# EAGLE board ADS7947 Breakout Layout V1 (EAGLE 9.6.2)
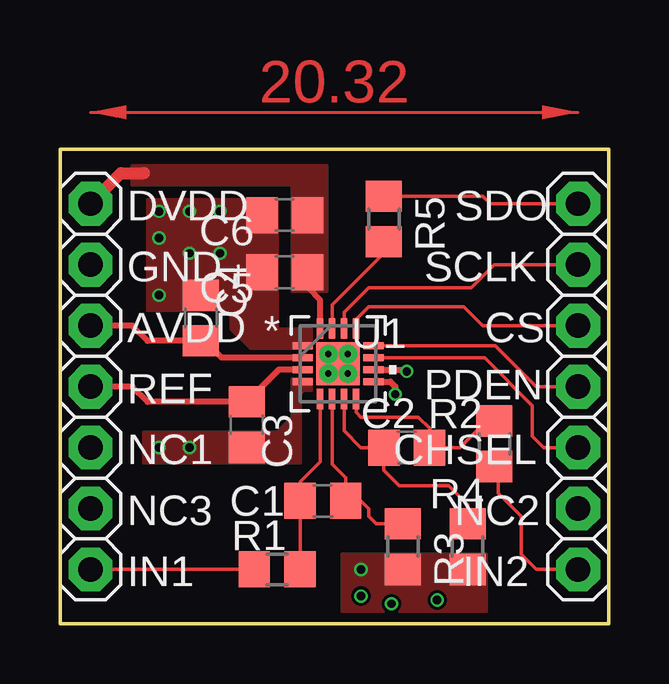
[diagram p0: board, top side]
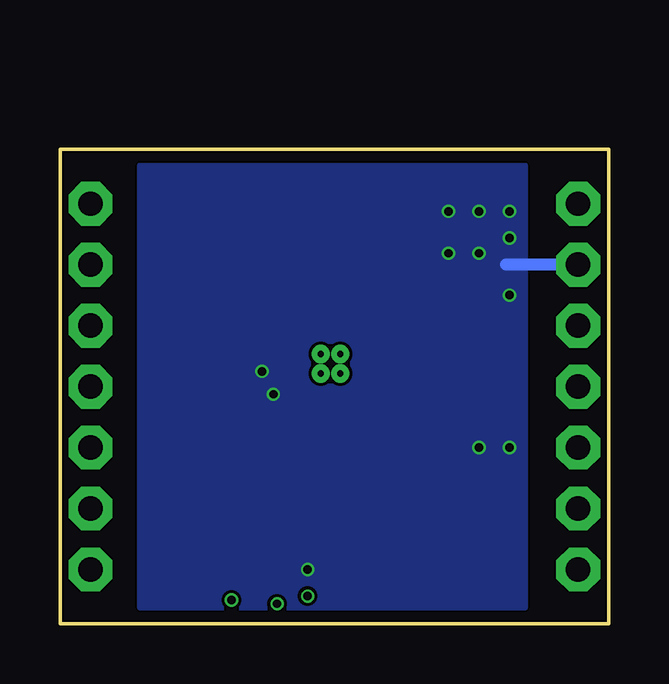
[diagram p1: board, bottom side, seen from below]

Size 22.86 x 19.78 mm. Coordinates in mm from the lower left corner, seen from the top.
Outline: 0,0 22.86,0 22.86,19.78 0,19.78 0,0
Copper layers (1*16): Top 0.035mm / dielectric 1.6mm / Bottom 0.035mm
Design rules "MacrofabStandard": minimum track width 5mil, minimum drill 10mil, track to track 5mil, track to pad 5mil, pad to pad 5mil, via to via 5mil, smd to smd 5mil, copper to edge 10mil, drill to drill 6mil, minimum pad ring 10mil, minimum via ring 4mil, stop-mask expansion 5mil, vias tented up to drill 0mil, thermal gap 10mil

## Footprints (pad centres in the part's own frame; a part is rotated, then mirrored left to right if it is on the bottom)
1X01 = drill 1.016 octagon: 1 0,0
C0805 = smd 1.3 x 1.5: 1 -0.95,0; 2 0.95,0
R0805 = smd 1.3 x 1.5: 1 -0.95,0; 2 0.95,0
RTE16_1P7X1P7 = smd 0.85 x 0.28: 1 -1.475,0.75; 2 -1.475,0.25; 3 -1.475,-0.25; 4 -1.475,-0.75; 9 1.475,-0.75; 10 1.475,-0.25; 11 1.475,0.25; 12 1.475,0.75 | smd 0.28 x 0.85: 5 -0.75,-1.475; 6 -0.25,-1.475; 7 0.25,-1.475; 8 0.75,-1.475; 13 0.75,1.475; 14 0.25,1.475; 15 -0.25,1.475; 16 -0.75,1.475 | smd 1.803 x 1.803: 17 0,0 | drill 0.254 pad 0.508: V -0.406,-0.406; V_1 -0.406,0.406; V_2 0.406,-0.406; V_3 0.406,0.406

## Placement (x,y rotation side)
AVDD  [1X01]  1.27,12.43 0 top
C1  470 pF  [C0805]  10.95,5.13 180 top
C2  470 pF  [C0805]  14.45,7.35 0 top
C3  1 uF  [C0805]  7.78,8.3 270 top
C4  1 uF  [C0805]  5.87,12.75 90 top
C5  0.1 uF  [C0805]  9.37,14.65 180 top
C6  1 uF  [C0805]  9.37,17.03 180 top
CHSEL  [1X01]  21.59,7.35 0 top
CS  [1X01]  21.59,12.43 0 top
DVDD  [1X01]  1.27,17.51 0 top
GND  [1X01]  1.27,14.97 0 top
IN1  [1X01]  1.27,2.27 0 top
IN2  [1X01]  21.59,2.27 0 top
NC1  [1X01]  1.27,7.35 0 top
NC2  [1X01]  21.59,4.81 0 top
NC3  [1X01]  1.27,4.81 0 top
PDEN  [1X01]  21.59,9.89 0 top
R1  5 Ohm  [R0805]  9.05,2.27 0 top
R2  5 Ohm  [R0805]  18.1,7.51 90 top
R3  5 Ohm  [R0805]  14.29,3.22 270 top
R4  5 Ohm  [R0805]  16.99,3.22 270 top
R5  47 Ohm  [R0805]  13.49,16.88 270 top
REF  [1X01]  1.27,9.89 0 top
SCLK  [1X01]  21.59,14.97 0 top
SDO  [1X01]  21.59,17.51 0 top
U1  ADS7947SRTET  [RTE16_1P7X1P7]  11.59,10.84 0 top

## Library data of the parts
AVDD CHSEL CS DVDD GND IN1 IN2 NC1-NC3 PDEN REF SCLK SDO = pinhead
C1-C6 = rcl; SPICEPREFIX: C
R1-R5 = rcl; SPICEPREFIX: R
U1 = ADS7947; DATASHEET_URL: http://www.ti.com/lit/gpn/ADS7947; DESCRIPTION: 12-Bit, 2 MSPS, Dual Channel, Pseudo-differential uPower Serial SAR ADC; FAMILY_NAME: PRECISION ADC (<=10MSPS); GENERIC_PART_NUMBER: ADS7947; INDUSTRY_STD_PKG_TYPE: WQFN; MANUFACTURER: Texas Instruments; PACKAGE_DESIGNATOR: RTE; PIN_COUNT: 16

## Nets
EPAD: U1.17
GND [GND]: C3.2 C4.2 C5.2 C6.2 GND.1 R3.2 R4.2 U1.1 U1.4 U1.9 U1.10
N$1: IN2.1 R2.1
N$2: C2.2 R2.2 U1.8
N$3: C1.2 R1.2 U1.5
N$4: IN1.1 R1.1
N$6: C2.1 R4.1 U1.7
N$7: C1.1 R3.1 U1.6
N$8: C3.1 REF.1 U1.3
N$9: AVDD.1 C4.1 U1.2
N$10: C5.1 C6.1 DVDD.1 U1.16
N$11: R5.2 U1.15
N$12: R5.1 SDO.1
N$13: SCLK.1 U1.14
N$14: CS.1 U1.13
N$15: PDEN.1 U1.12
N$16: CHSEL.1 U1.11

## Tracks (layer width: path | path; a pad name or v marks a point on that pad's centre or on a via)
GND  (via drill 0.35)
  Top 0.254: U1.9 13.77,10.09 13.97,9.89 v13.97,9.57 | U1.10 14.38,10.59 v14.45,10.53
  Bottom 0.508: GND.1 4.29,14.97
  other vias: 6.67,15.45 4.13,16.08 5.4,15.45 5.4,17.19 6.67,17.19 4.13,13.7 4.13,17.19 5.4,7.35 4.13,7.35 12.54,2.27
  pour Top (no thermals): 10.48,11.48 10.48,12.27 9.05,12.27 9.05,17.67 3.65,17.67 3.65,13.07 7.14,13.07 7.14,12.27 7.94,11.48
  pour Top (no thermals): 10.48,10.21 10.48,9.73 10.16,9.73 10,9.57 10,6.71 3.49,6.71 3.49,7.99 9.05,7.99 9.68,8.62 9.68,10.21
  pour Bottom (no thermals): 3.49,19.1 3.49,0.68 19.53,0.68 19.53,19.1
  pour Top (no thermals): 17.78,2.9 11.75,2.9 11.75,0.52 17.78,0.52
GND1  (via drill 0.35)
  other vias: 12.54,1.16
GND2  (via drill 0.35)
  other vias: 15.72,1
GND3  (via drill 0.35)
  other vias: 13.81,0.84
N$1
  Top 0.152: R2.1 18.26,6.4 18.26,5.45 19.21,4.49 19.21,2.9 19.84,2.27 IN2.1
N$2
  Top 0.152: U1.8 12.34,8.82 12.54,8.62 14.92,8.62 15.4,8.15 C2.2 16.67,7.35 17.94,8.62 R2.2
N$3
  Top 0.152: U1.5 10.84,6.76 10,5.92 C1.2 R1.2
N$4
  Top 0.152: R1.1 IN1.1
N$6
  Top 0.152: U1.7 11.84,8.05 12.54,7.35 C2.1 13.5,6.39 14.13,5.76 16.19,5.76 16.99,4.97 R4.1
N$7
  Top 0.152: U1.6 11.34,6.65 11.9,6.08 C1.1 12.54,5.13 12.86,4.81 12.86,4.49 13.18,4.17 R3.1
N$8
  Top 0.254: U1.3 9.12,10.59 C3.1 3.65,9.25 3.02,9.89 REF.1
N$9
  Top 0.254: U1.2 6.74,11.09 6.03,11.8 C4.1 3.65,11.8 3.02,12.43 AVDD.1
N$10
  Top 0.254: U1.16 10.84,13.5 10.32,14.02 C5.1
  Top 0.508: DVDD.1 2.54,18.78 3.49,18.78
  pour Top (no thermals): 9.68,13.86 11.11,13.86 11.11,18.46 9.68,18.46
  pour Top (no thermals): 9.68,18.3 3.02,18.3 3.02,19.1 11.11,19.1 11.11,18.3
N$11
  Top 0.152: U1.15 11.34,13.29 13.49,15.45 R5.2
N$12
  Top 0.152: R5.1 17.62,17.83 17.94,17.51 SDO.1
N$13
  Top 0.152: U1.14 11.84,13 12.86,14.02 17.15,14.02 18.1,14.97 SCLK.1
N$14
  Top 0.152: U1.13 12.34,12.7 12.86,13.22 16.83,13.22 17.62,12.43 CS.1
N$15
  Top 0.152: U1.12 18.14,11.59 19.84,9.89 PDEN.1
N$16
  Top 0.152: U1.11 17.69,11.09 19.69,9.1 19.69,7.83 20.16,7.35 CHSEL.1
(copper drawn outside any net)
  shapes: Top area x1